# Altium PCB PCB_Microfonos.PcbDoc
Units mm, origin at the board's own origin, x right, y up, seen from the top; angles counter-clockwise.
Board outline 50 x 43 mm, 2 copper layers (Top Layer, Bottom Layer); 36 components, 19 nets, 86 pads, 11 vias.
Unrouted connection lines stored in the file: 3.
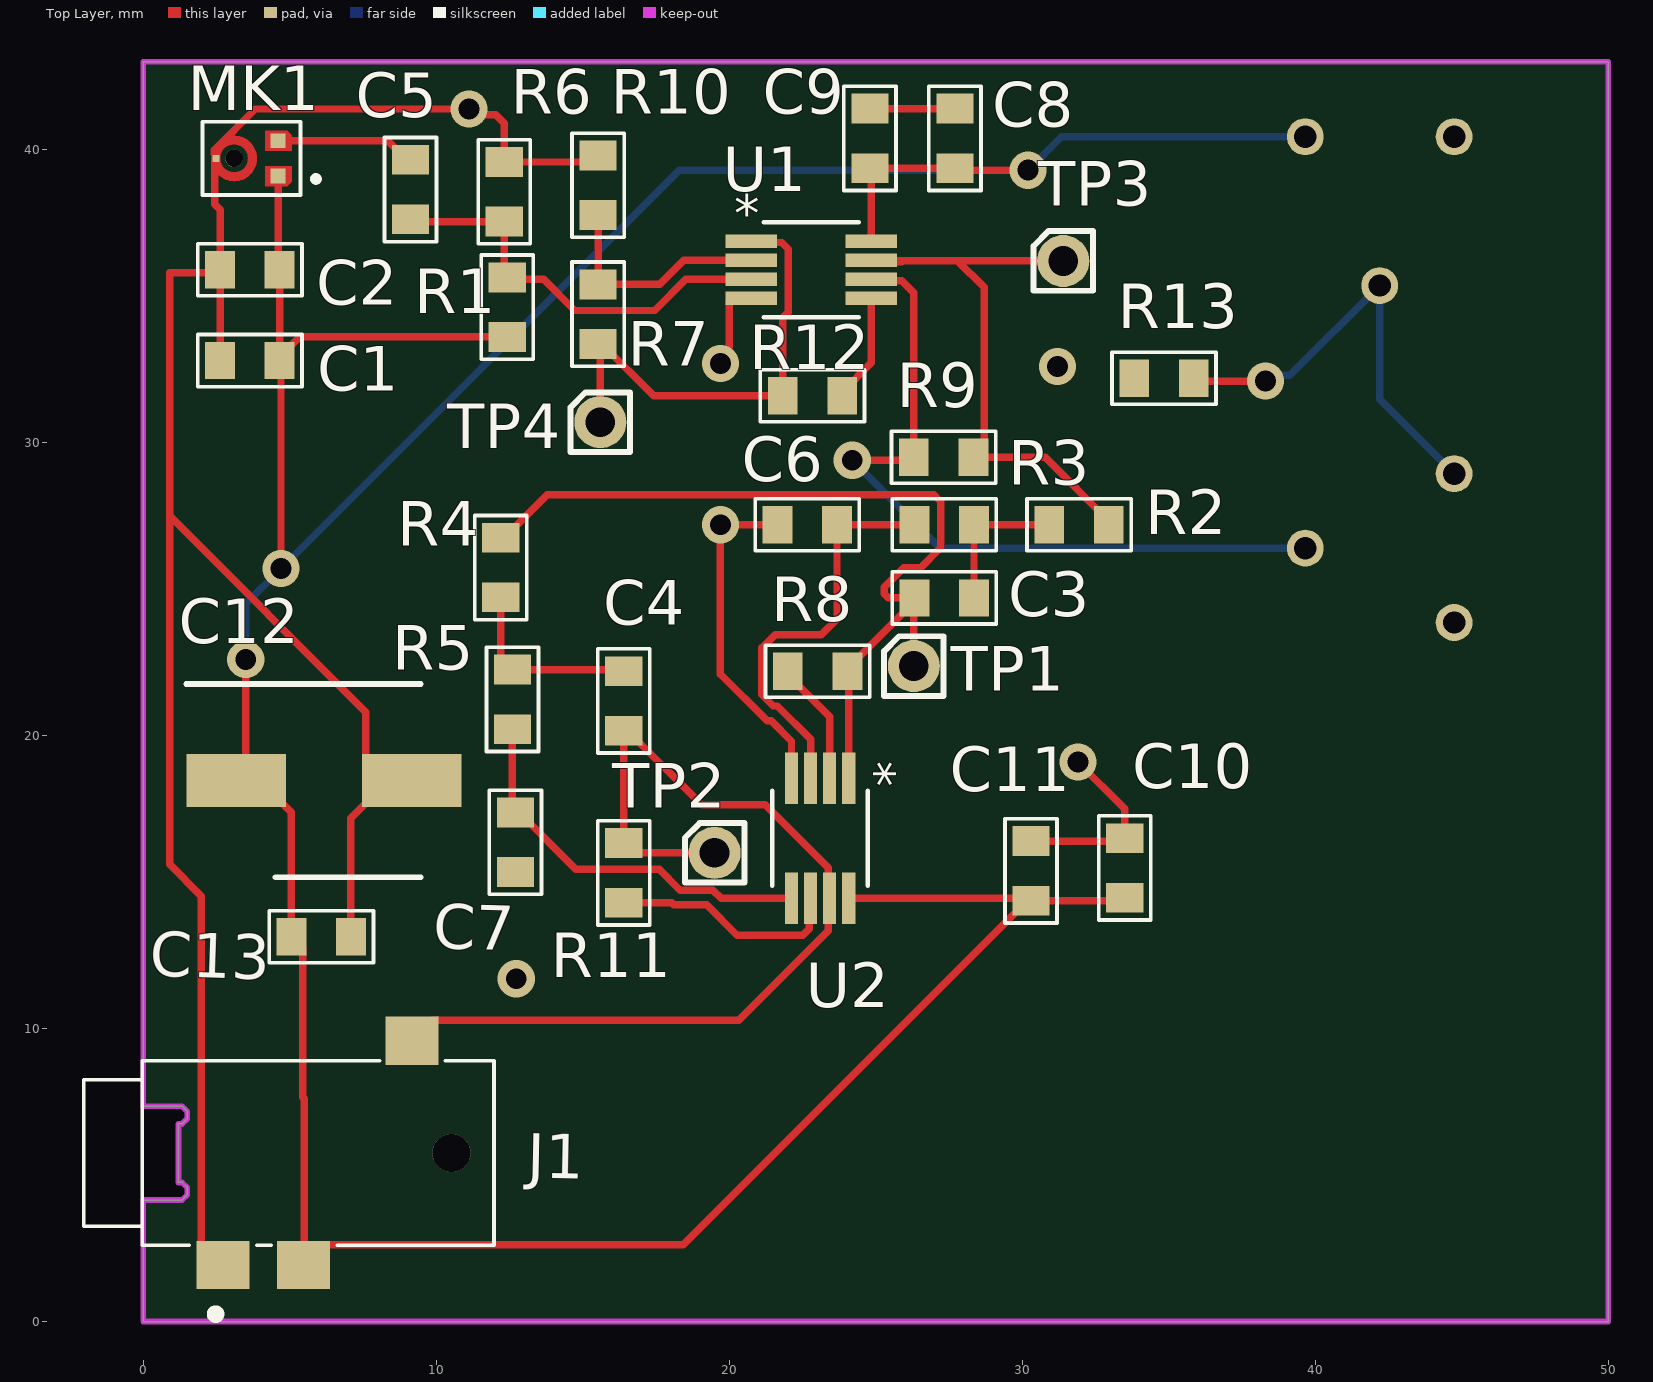
[diagram p0: Top Layer view]
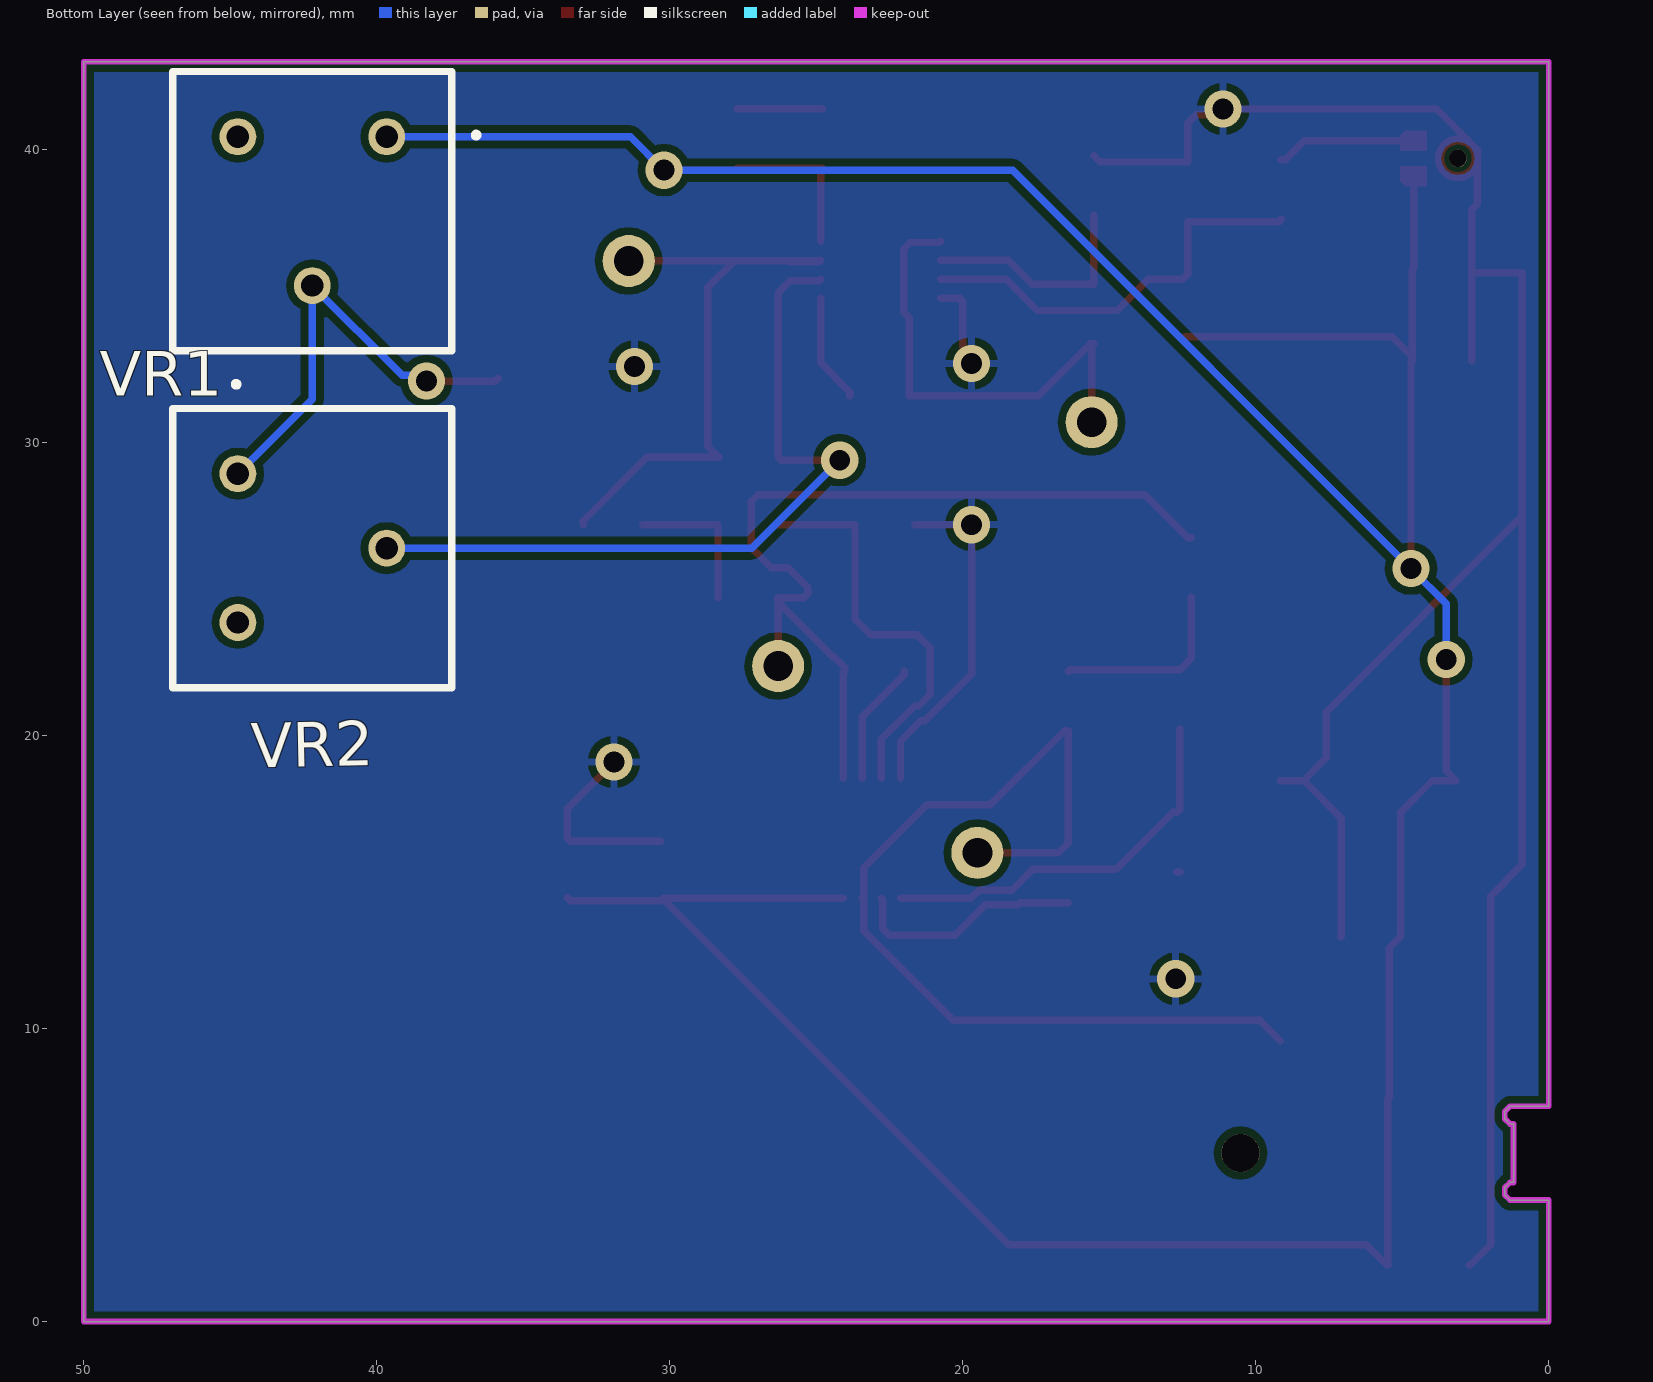
[diagram p1: Bottom Layer view, seen from below]

## Layer stack, top to bottom
Top Solder: solder mask 0.0102, Solder Resist, Dk 3.5
Top Layer: signal copper 0.0356
Dielectric 1: dielectric 0.32, FR-4, Dk 4.8
Bottom Layer: signal copper 0.0356
Bottom Solder: solder mask 0.0102, Solder Resist, Dk 3.5

## Board outline
1.2,4.75 1.325,4.75 1.5,4.575 1.5,4.325 1.325,4.15 0,4.15 0,0 50,0 50,43 0,43 0,7.35 1.325,7.35 1.5,7.175 1.5,6.925 1.325,6.75 1.2,6.75

## Design rules (kind name [scope] priority, off if disabled: settings)
Clearance [All] p1: gap=0.254 ignorepadtopadclearanceinfootprint=FALSE except(0: Arc-Hole Track-Hole SMDPad-Hole THPad-Hole Via-Hole Fill-Hole Poly-Hole Region-Hole Text-Hole)
HoleSize [All] p1: absolutevalues=TRUE maxlimit=6.3 minlimit=0.2 maxpercent=80.000 minpercent=20.000
PolygonConnect [All] p1: connectstyle=Relief reliefconductorwidth=0.254 reliefentries=4 polygonreliefangle="90 Angle" airgapwidth=0.254
RoutingVias [All] p1: holewidth=0.711 width=1.27 viastyle="Through Hole" minholewidth=0.2 minwidth=0.45 maxholewidth=0.711 maxwidth=1.27
SolderMaskExpansion [All] p1: expansion=0.102 istentingtop=FALSE
Width [All] p1: maxlimit=0.254 minlimit=0.127 preferedwidth=0.254
29 further rules are at their usual default settings.

## Classes and differential pairs
component class MICROFONO: C1 C2 MK1
component class "FILTRADO Y AMPLIFICACION": C3 C4 C5 C6 C7 C8 C9 C10 C11 R1 R2 R3 R4 R5 R6 R7 R8 R9 R10 R11 R12 R13 TP1 TP2 TP3 TP4 U1 U2 VR1 VR2
component class CONECTOR: C12 C13 J1

## Components (designator, comment, footprint, x,y, rotation, side; value= is the part's Value field where it differs from the comment)
C1 "100nF" 0805C-TBD 4.4,32.8 r180 top
C2 "100p" 0805C-GENERIC 4.4,35.9 r180 top
C3 "3.6n" 0805C-GENERIC 28.1,24.7 r180 top
C4 "5.6n" 0805C-GENERIC 16.4,21.946 r270 top
C5 "3u" 0805C-GENERIC 9.122,39.4 r270 top
C6 "360p" 0805C-GENERIC 21.9,27.2 r0 top
C7 "470p" 0805C-GENERIC 12.7,15.6 r90 top
C8 "100n" 0805C-GENERIC 27.7,39.622 r90 top
C9 "100p" 0805C-GENERIC 24.8,39.622 r90 top
C10 "100n" 0805C-GENERIC 33.5,14.722 r90 top
C11 "100p" 0805C-GENERIC 30.3,14.622 r90 top
C12 "EEE-HC1C101XP" CAPAE660X800N 6.168,18.467 r0 top
C13 "10u" 0805C-GENERIC 5.316,13.133 r0 top
J1 "SJ2-35953A-SMT-TR" CUI_SJ2-35953A-SMT-TR 5.969,5.758 r0 top
MK1 "INMP510" XDCR_INMP510 3.695,39.7 r180 top
R1 "110k" 0805R-GENERIC 12.422,33.863 r90 top
R2 "1.6k" 0805R-GENERIC 32.7,27.2 r180 top
R3 "47k" 0805R-GENERIC 28.1,27.2 r180 top
R4 "5.1k" 0805R-GENERIC 12.2,26.5 r270 top
R5 "5.1k" 0805R-GENERIC 12.6,22 r270 top
R6 "1.8k" 0805R-GENERIC 12.322,37.8 r90 top
R7 "62k" 0805R-GENERIC 15.522,33.622 r90 top
R8 "51k" 0805R-GENERIC 23.778,22.2 r180 top
R9 "20k" 0805R-GENERIC 28.078,29.5 r180 top
R10 "2k" 0805R-GENERIC 15.522,38.022 r90 top
R11 "10k" 0805R-GENERIC 16.4,16.078 r270 top
R12 "5.6k" 0805R-GENERIC 23.6,31.6 r180 top
R13 "820" 0805R-GENERIC 35.6,32.2 r180 top
TP1 "LPFE1" TESTPIN 26.3,22.376 r0 top
TP2 "LPFE2" TESTPIN 19.5,16 r0 top
TP3 "AMP" TESTPIN 31.4,36.2 r0 top
TP4 "HPF" TESTPIN 15.6,30.7 r0 top
U1 "Part Number: ADA4661-2ARMZ-R7" RM_8 22.8,35.9 r0 top value=Value
U2 "Part Number: ADA4661-2ARMZ-R7" RM_8 23.1,16.5 r270 top value=Value
VR1 "3310Y-001-102L" 3310Y-001 42.2,37.9 r0 bottom
VR2 "3310Y-001-103L" 3310Y-001 42.2,26.4 r270 bottom

## Footprints (in the part's own frame and the unit in brackets; to place one, negate y for a bottom-side part, rotate by r counter-clockwise, add the part's x,y. Pads: shape width x height; smd on the part's side, far side on the other; paste and mask are expansions set on the pad)
0805C-GENERIC [mil] "CAPACITOR 0805"
  rect 40x50 smd: 1(-10,0) 2(70,0)
  silkscreen extent -40,-35 100,35, body extent -11,-25 70,25, height 26
0805C-TBD [mil] "CAPACITOR 0805"
  rect 40x50 smd: 1(-10,0) 2(70,0)
  silkscreen extent -40,-35 100,35, body extent -11,-25 70,25, height 26
0805R-GENERIC [mil] "RESISTOR 0805"
  rect 40x50 smd: 1(-10,0) 2(70,0)
  silkscreen extent -40,-35 100,35, body extent -11,-25 70,25, height 27
3310Y-001 [mm]
  round 1.26 hole 0.76: 1(-2.54,-2.54) 2(0,2.54) 3(2.54,-2.54)
  silkscreen extent -5.65,-4.76 4.76,4.76, body extent -4.7,-4.76 4.83,4.76, height 6.38
CAPAE660X800N [mm]
  rect 3.4x1.8 smd: 1(-3,0) 2(3,0)
  silkscreen extent -4.7,-3.3 3.3,3.3, body extent -3.9,-3.4 3.9,3.4, height 8
CUI_SJ2-35953A-SMT-TR [mm]
  rect 1.8x1.65 smd: 1(-3.25,-3.825) 2(3.2,3.825) 3(-0.5,-3.825)
  round 1.3 hole 1.3 unplated: ""(4.55,0)
  silkscreen extent -8,-5.65 6,3.15
RM_8 [mm]
  rect 1.761x0.451 smd paste+0 mask+0: 1(-2.05,0.975) 2(-2.05,0.325) 3(-2.05,-0.325) 4(-2.05,-0.975) 5(2.05,-0.975) 6(2.05,-0.325) 7(2.05,0.325) 8(2.05,0.975)
  silkscreen extent -1.63,-1.63 1.63,1.63, body extent 0,0 0.25,0.25, height 0.25
TESTPIN [mil]
  round 70 hole 40: 1(0,0)
  silkscreen extent -40,-40 40,40, body extent -40,-40 40,40, height 470
XDCR_INMP510 [mm]
  rect 0.5x0.5 smd paste-1 mask+0: 1(-0.905,0.6) 2(-0.905,-0.6)
  rect 0.25x0.25 smd paste-1 mask+0: 3(1.215,0)
  round 0.6 hole 0.6 unplated: ""(0.595,0)
  Top Layer region: 248 vertices and 0 holes, not listed, extent -0.18,-0.77 1.37,0.77
  Top Layer region: -0.475,-0.95 -1.215,-0.95 -1.375,-0.79 -1.375,-0.27 -0.475,-0.27
  Top Layer region: -0.475,0.27 -1.375,0.27 -1.375,0.79 -1.215,0.95 -0.475,0.95
  silkscreen extent -2.3,-1.25 1.68,1.25

## Part data
C1: library part 0805C-100nF-25V-X7R-MUR, "CAPACITOR 0805 CERAMIC", Supplier Part Number 1=490-1673-1-ND, Supplier 1=Digi-Key
C2 C3 C4 C5 C6 C7 C8 C9 C10 C11 C13: library part C0805-GENERIC, "GENERIC CAPACITOR NON POLARISED0603"
C12: "Capacitor Polarised", Manufacturer_Name=Panasonic, Mouser Part Number=667-EEE-HC1C101XP, Allied Price/Stock=https://www.alliedelec.com/panasonic-eee-hc1c101xp/70258549/, Allied_Number=70258549, Datasheet Link=http://industrial.panasonic.com/www-cgi/jvcr13pz.cgi?E+PZ+3+ABA0109+EEEHC1C101XP+7+WW, Height=8mm, Manufacturer_Part_Number=EEE-HC1C101XP, Mouser Price/Stock=https://www.mouser.com/Search/Refine.aspx?Keyword=667-EEE-HC1C101XP
J1: "3.5 mm, Stereo, Right Angle, Surface Mount _SMT_, Audio Jack Connector", Package=None, Availability=Unavailable, CUI_purchase_URL=https://www.cuidevices.com/product/interconnect/connectors/audio-connectors/jacks/sj2-3595x-smt-series?utm_source=snapeda.com&utm_medium=referral&utm_campaign=snapedaBOM, MF="CUI Devices", MP=SJ2-35953A-SMT-TR, Price=None, SnapEDA_Link=https://www.snapeda.com/parts/SJ2-35953A-SMT-TR/CUI%20Devices/view-part/701771/?ref=snap
MK1: "60Hz ~ 20kHz Analog Microphone MEMS _Silicon_ 1.5V ~ 3.63V Omnidirectional _-38dB Â±2dB @ 94dB SPL_ Solder Pads", Package="LGA-3 TDK-InvenSense", Digi-Key_Part_Number=1428-1016-2-ND, Digi-Key_Purchase_URL=https://www.digikey.com/product-detail/en/tdk-invensense/INMP510ACEZ-R7/1428-1016-2-ND/4311534?utm_source=snapeda&utm_medium=aggregator&utm_campaign=symbol, MF="TDK InvenSense", MP=INMP510, SnapEDA_Link=https://www.snapeda.com/parts/INMP510/TDK%20InvenSense/view-part/2757133/?ref=snap
R1 R2 R3 R4 R5 R6 R7 R8 R9 R10 R11 R12 R13: library part R0805-GENERIC, "GENERIC RESISTOR 0805"
TP1 TP2 TP3 TP4: library part TESTPIN, "TESTPIN SINGLE PIN HEADER", Manufacturer 1="Sharon Long Industries", Manufacturer Part Number 1=Cut-it-yourself, Supplier 1 Part number=Cut-It-Yourself, Reel=TH, Supplier 1="Sharon Long Industries"
U1 U2: library part ADA4661-2ARMZ-R7, "No Description Available", Built_By=EMA_Christopher, Copyright="Copyright (C) 2016 Accelerated Designs. All rights reserved", Manufacturer_Part_Number=ADA4661-2ARMZ-R7, RefDes=RefDes, Type=DEV, Vendor="Analog Devices Inc"
VR1: library part 3310Y-001-103L, "Variable Resistor", Manufacturer_Name=Bourns, Mouser Part Number=652-3310Y-001-103L, RS Part Number=5220625P, Datasheet Link=http://www.bourns.com/docs/Product-Datasheets/3310.pdf, Manufacturer_Part_Number=3310Y-001-103L, Mouser Price/Stock=https://www.mouser.com/Search/Refine.aspx?Keyword=652-3310Y-001-103L, RS Price/Stock=http://uk.rs-online.com/web/p/products/5220625P
VR2: "Variable Resistor", Manufacturer_Name=Bourns, Mouser Part Number=652-3310Y-001-103L, RS Part Number=5220625P, Datasheet Link=http://www.bourns.com/docs/Product-Datasheets/3310.pdf, Manufacturer_Part_Number=3310Y-001-103L, Mouser Price/Stock=https://www.mouser.com/Search/Refine.aspx?Keyword=652-3310Y-001-103L, RS Price/Stock=http://uk.rs-online.com/web/p/products/5220625P

## Via types
v1: diameter 1.27, hole 0.711, Top Layer to Bottom Layer, 11 vias

## Nets (pads, with @x,y where several pads share a name; then routed paths per layer and width w, separated by ;. In a path a pad name is that pad's centre, name@x,y a point inside that pad or via, vN(x,y) a via of type N, cw(c..) or ccw(c..) an arc to the next point about the centre after c; other vN are vias at no path point)
GND: C1.2 C2.2 C6.1 C7.1 C8.2 C9.2 C10.2 C11.2 C12.2 C13.2 J1.1 MK1.3 R6.2 R10.2 R13.2 U1.4 U2.4 | length 101.9
  Top Layer w0.254: 2.419,39.851 2.419,39.982 3.824,41.387 v1(11.112,41.387) 11.307,41.193 12.03,41.193 12.322,40.901 R6.2 15.3,39.578 R10.2 ; MK1.3 2.451,39.7 2.438,39.686 2.438,38.139 2.622,37.955 C2.2 ; C1.2 2.622,35.8 C2.2 ; J1.1 2.679,1.933 1.981,2.631 1.981,14.525 0.9,15.606 0.9,27.5 ; C13.2 7.078,13.15 7.078,17.177 C12.2@8.368,18.467 ; C12.2 C12.2@8.368,18.467 ; C7.1@12.573,15.346 C7.1 ; v1(19.7,32.7) 19.7,32.975 19.996,33.271 19.996,34.827 20.095,34.925 U1.4 ; C6.1 v1(19.7,27.2) 19.7,22.1 21.296,20.504 21.432,20.504 22.125,19.812 U2.4 ; C9.2 C8.2 ; C11.2 33.4,16.4 C10.2 33.5,17.5 v1(31.9,19.1) ; 0.9,27.5 7.595,20.805 7.595,19.24 C12.2@8.368,18.467 ; 0.9,27.5 0.9,35.8 2.522,35.8 C2.2
  other v1: 12.731,11.7 31.2,32.6
In_E1: C6.2 R3.2 U2.3 | length 14.1
  Top Layer w0.254: U2.3 22.775,19.88 21.643,21.012 21.506,21.012 21.111,21.407 21.111,22.993 21.565,23.447 23.147,23.447 23.678,23.978 C6.2 R3.2
In_E2: C7.2 R5.2 U2.5 | length 13.5
  Top Layer w0.254: R5.2 12.6,17.478 C7.2 12.827,17.378 14.762,15.443 17.606,15.443 18.319,14.73 19.441,14.73 19.721,14.45 U2.5
In_HP: C5.2 R1.2 R6.1 U1.3 | length 14.4
  Top Layer w0.254: C5.2 9.198,37.546 R6.1 12.322,35.741 R1.2 12.488,35.575 13.666,35.575 14.73,34.511 17.452,34.511 18.516,35.575 U1.3
NetC3_1: C3.1 R2.2 R3.1 | length 5.1
  Top Layer w0.254: C3.1 R3.1 R2.2
NetC4_1: C4.1 R4.2 R5.1 | length 6.5
  Top Layer w0.254: R4.2 12.2,22.635 12.581,22.254 R5.1 16.346,22.254 C4.1
NetC5_1: C5.1 MK1.2 | length 4.8
  Top Layer w0.254: MK1.2 8.349,40.3 8.995,39.654 C5.1
NetC12_2: 
NetR7_2: R7.2 R10.1 U1.2 | length 7.9
  Top Layer w0.254: R10.1 R7.2 17.623,35.4 18.448,36.225 U1.2
NetR8_2: R8.2 U2.2 | length 4.2
  Top Layer w0.254: R8.2 22,22.073 23.425,20.648 U2.2
NetR9_2: R9.2 U1.6 VR2.2 | length 26.1
  Top Layer w0.254: v1(24.2,29.4) 26.2,29.4 R9.2 26.3,35.12 25.888,35.531 24.894,35.531 U1.6
  Bottom Layer w0.254: v1(24.2,29.4) 27.2,26.4 VR2.2
NetR11_2: R11.2 U2.6 | length 7.9
  Top Layer w0.254: R11.2 18.03,14.3 18.108,14.222 19.23,14.222 20.264,13.188 22.508,13.188 22.731,13.412 22.731,14.406 U2.6
NetR12_1: R12.1 U1.5 | length 3.7
  Top Layer w0.254: R12.1 23.854,31.727 24.85,32.723 U1.5
NetR13_1: R13.1 VR1.2 VR2.1 | length 15.2
  Top Layer w0.254: R13.1 35.954,32.1 v1(38.3,32.1)
  Bottom Layer w0.254: v1(38.3,32.1) 38.494,32.294 39.134,32.294 VR1.2 42.2,31.48 VR2.1
Out_A: R2.1 R9.1 TP3.1 U1.7 | length 20.5
  Top Layer w0.254: U1.7 U1.7@24.863,36.212 ; 25.888,36.181 24.894,36.181 U1.7@24.863,36.212 ; TP3.1 31.388,36.212 27.788,36.212 ; R2.1 32.954,27.327 30.781,29.5 R9.1 28.7,29.868 28.7,35.3 27.788,36.212 ; U1.7@24.863,36.212 27.788,36.212
Out_E1: C3.2 R4.1 R8.1 TP1.1 U2.1 | length 30.4
  Top Layer w0.254: R4.1 12.327,26.754 13.789,28.216 26.988,28.216 27.211,27.993 27.211,26.407 26.537,25.733 25.958,25.733 25.284,25.059 25.284,24.849 25.433,24.7 C3.2 26.322,24.573 C3.2@26.3,24.551 ; U2.1 24.075,22.157 R8.1 24.032,22.327 24.413,22.708 24.457,22.708 C3.2@26.3,24.551 ; TP1.1 C3.2@26.3,24.551
Out_E2: C4.2 J1.2 R11.1 TP2.1 U2.7 | length 33.9
  Top Layer w0.254: J1.2 9.867,10.281 20.319,10.281 23.381,13.343 23.381,14.406 U2.7 23.381,14.494 23.381,15.488 21.232,17.638 19.057,17.638 16.527,20.168 C4.2 R11.1 16.732,16 TP2.1
Out_HP: R7.1 R12.2 TP4.1 U1.1 | length 16.2
  Top Layer w0.254: TP4.1 15.6,33.29 R7.1 15.649,33.368 17.417,31.6 R12.2 21.822,34.263 22.012,34.453 22.012,36.608 21.788,36.831 20.794,36.831 U1.1
VCC: C1.1 C2.1 C8.1 C9.1 C10.1 C11.1 C12.1 C13.1 J1.3 MK1.1 R1.1 U1.8 U2.8 VR1.1 | length 135.8
  Top Layer w0.254: v1(3.5,22.6) 3.5,18.799 C12.1 3.968,18.467 5.046,17.39 C13.1@5.046,13.15 ; MK1.1 4.6,35.954 C2.1 C1.1@4.654,32.927 ; v1(4.7,25.7) 4.7,32.754 C1.1 C1.1@4.654,32.927 ; C13.1 C13.1@5.046,13.15 ; J1.3 5.5,1.964 5.5,7.6 5.443,7.656 5.443,12.752 C13.1@5.046,13.15 ; J1.3@5.525,1.933 6.223,2.631 18.436,2.631 30.173,14.368 C11.1 ; R1.1 5.336,33.609 C1.1@4.654,32.927 ; U2.8 30.218,14.45 C11.1 ; U1.8 24.85,39.318 C9.1 C8.1 27.768,39.3 v1(30.2,39.3) ; C10.1 33.4,14.368 C11.1
  Bottom Layer w0.254: v1(3.5,22.6) 3.5,24.5 v1(4.7,25.7) 18.3,39.3 v1(30.2,39.3) 31.34,40.44 VR1.1
pads on no net: J1. MK1. VR1.3 VR2.3

## Polygon pours and split planes (outlines as drawn)
GND on Bottom Layer "GND_L02_P000" (solid, remove dead copper, pour order 0): 0.006,-0.002 0.006,42.968 49.875,42.968 50.194,42.649 50.194,-0.045

## Keep-outs
Keep-Out Layer:
  lines w0.2: 0,0 50,0 ; 0,0 0,4.15 ; 0,0 50,0 ; 0,0 0,4.15 ; 0,0 50,0 ; 0,0 0,4.15 ; 0,4.15 1.325,4.15 ; 0,4.15 1.325,4.15 ; 0,4.15 1.325,4.15 ; 0,7.35 1.325,7.35 ; 0,7.35 0,43 ; 0,7.35 1.325,7.35 ; 0,7.35 0,43 ; 0,7.35 1.325,7.35 ; 0,7.35 0,43 ; 0,43 50,43 ; 0,43 50,43 ; 0,43 50,43 ; 1.2,4.75 1.2,6.75 ; 1.2,4.75 1.325,4.75 ; 1.2,4.75 1.2,6.75 ; 1.2,4.75 1.325,4.75 ; 1.2,4.75 1.2,6.75 ; 1.2,4.75 1.325,4.75 ; 1.2,6.75 1.325,6.75 ; 1.2,6.75 1.325,6.75 ; 1.2,6.75 1.325,6.75 ; 1.325,4.15 1.5,4.325 ; 1.325,4.15 1.5,4.325 ; 1.325,4.15 1.5,4.325 ; 1.325,4.75 1.5,4.575 ; 1.325,4.75 1.5,4.575 ; 1.325,4.75 1.5,4.575 ; 1.325,6.75 1.5,6.925 ; 1.325,6.75 1.5,6.925 ; 1.325,6.75 1.5,6.925 ; 1.325,7.35 1.5,7.175 ; 1.325,7.35 1.5,7.175 ; 1.325,7.35 1.5,7.175 ; 1.5,4.325 1.5,4.575 ; 1.5,4.325 1.5,4.575 ; 1.5,4.325 1.5,4.575 ; 1.5,6.925 1.5,7.175 ; 1.5,6.925 1.5,7.175 ; 1.5,6.925 1.5,7.175 ; 50,0 50,43 ; 50,0 50,43 ; 50,0 50,43

## Text inside footprints (layer, text, board x,y; h text height)
U1: Top Overlay "*" at 20.179,37.199 h1.27; Mechanical 13 "*" at 21.364,36.054 h1.27
U2: Top Overlay "*" at 24.399,19.121 h1.27 r270; Mechanical 13 "*" at 23.254,17.936 h1.27 r270